# Altium PCB PCB.PcbDoc (part 1 of 2)
Units mm, origin at the board's own origin, x right, y up, seen from the top; angles counter-clockwise.
Board outline 148 x 108 mm, 2 copper layers (Top Layer, Bottom Layer); 136 components, 143 nets, 391 pads, 164 vias.
Unrouted connection lines stored in the file: 1.
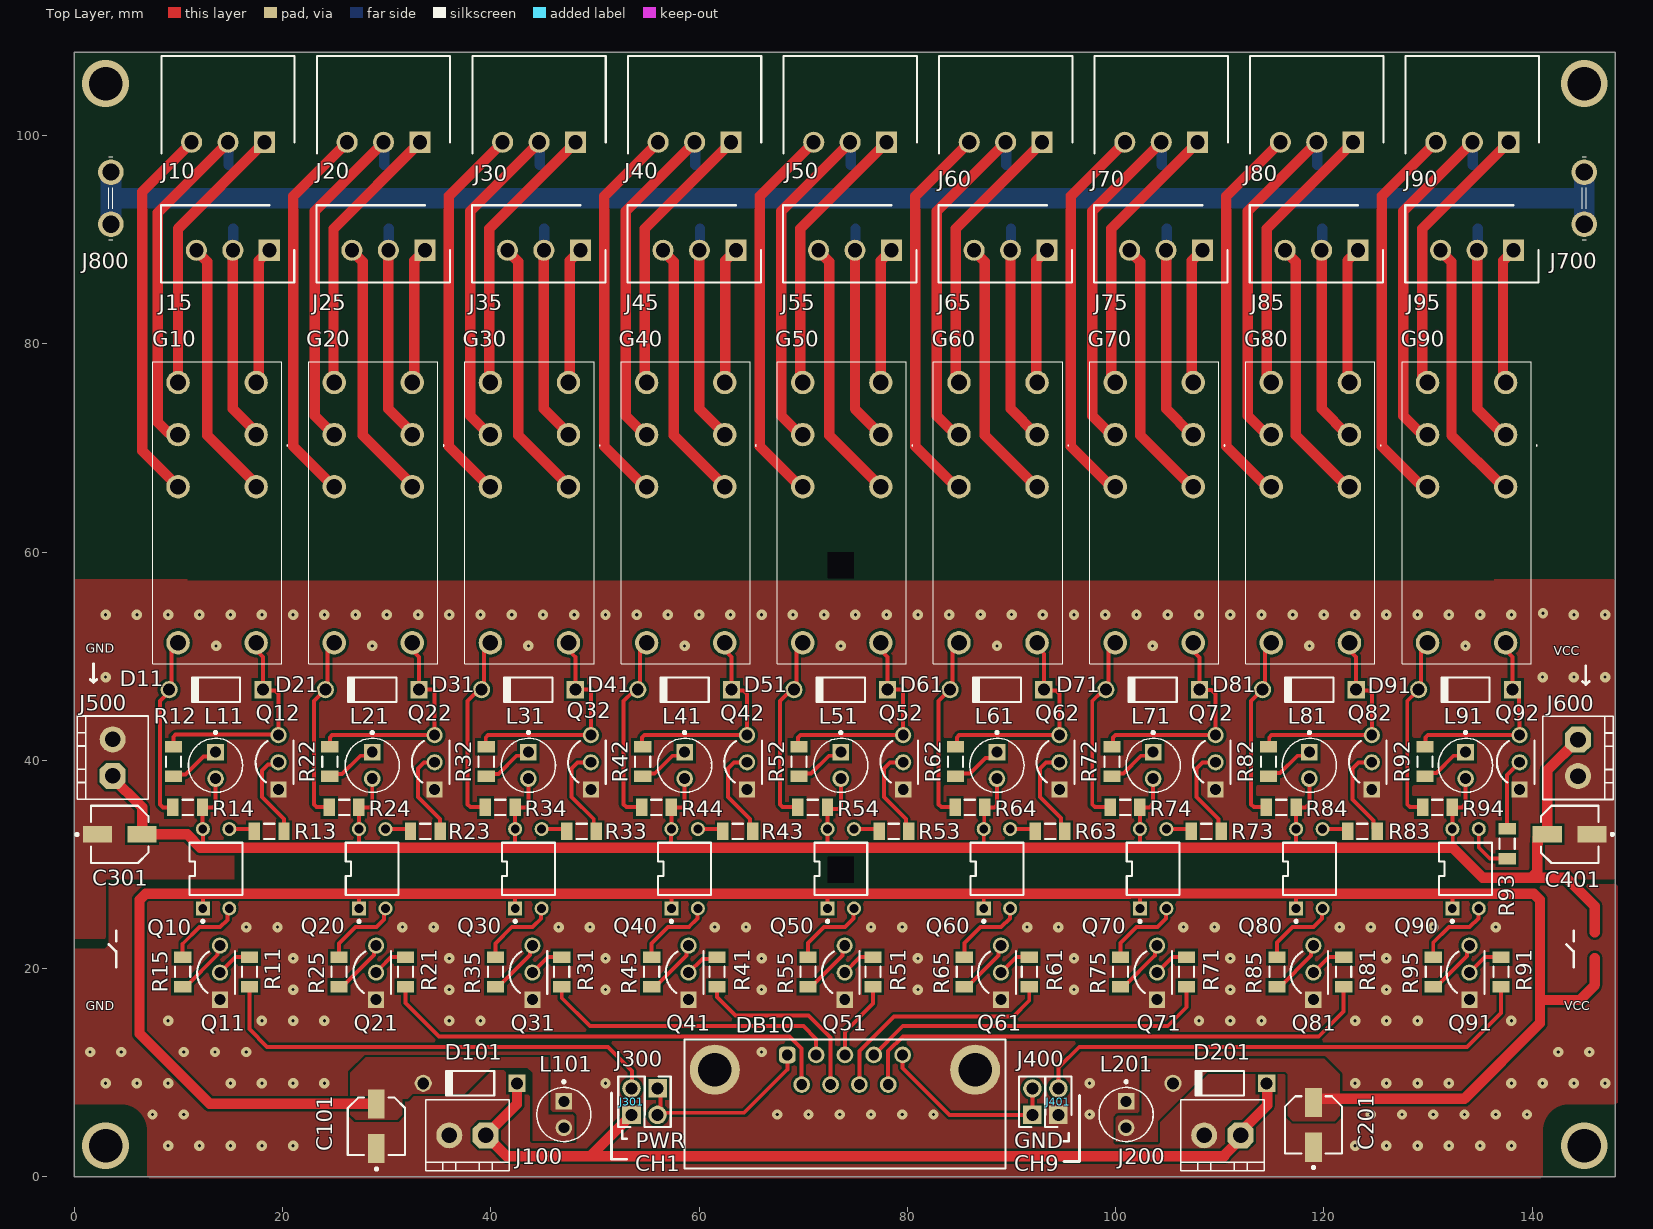
[diagram p0: Top Layer view]
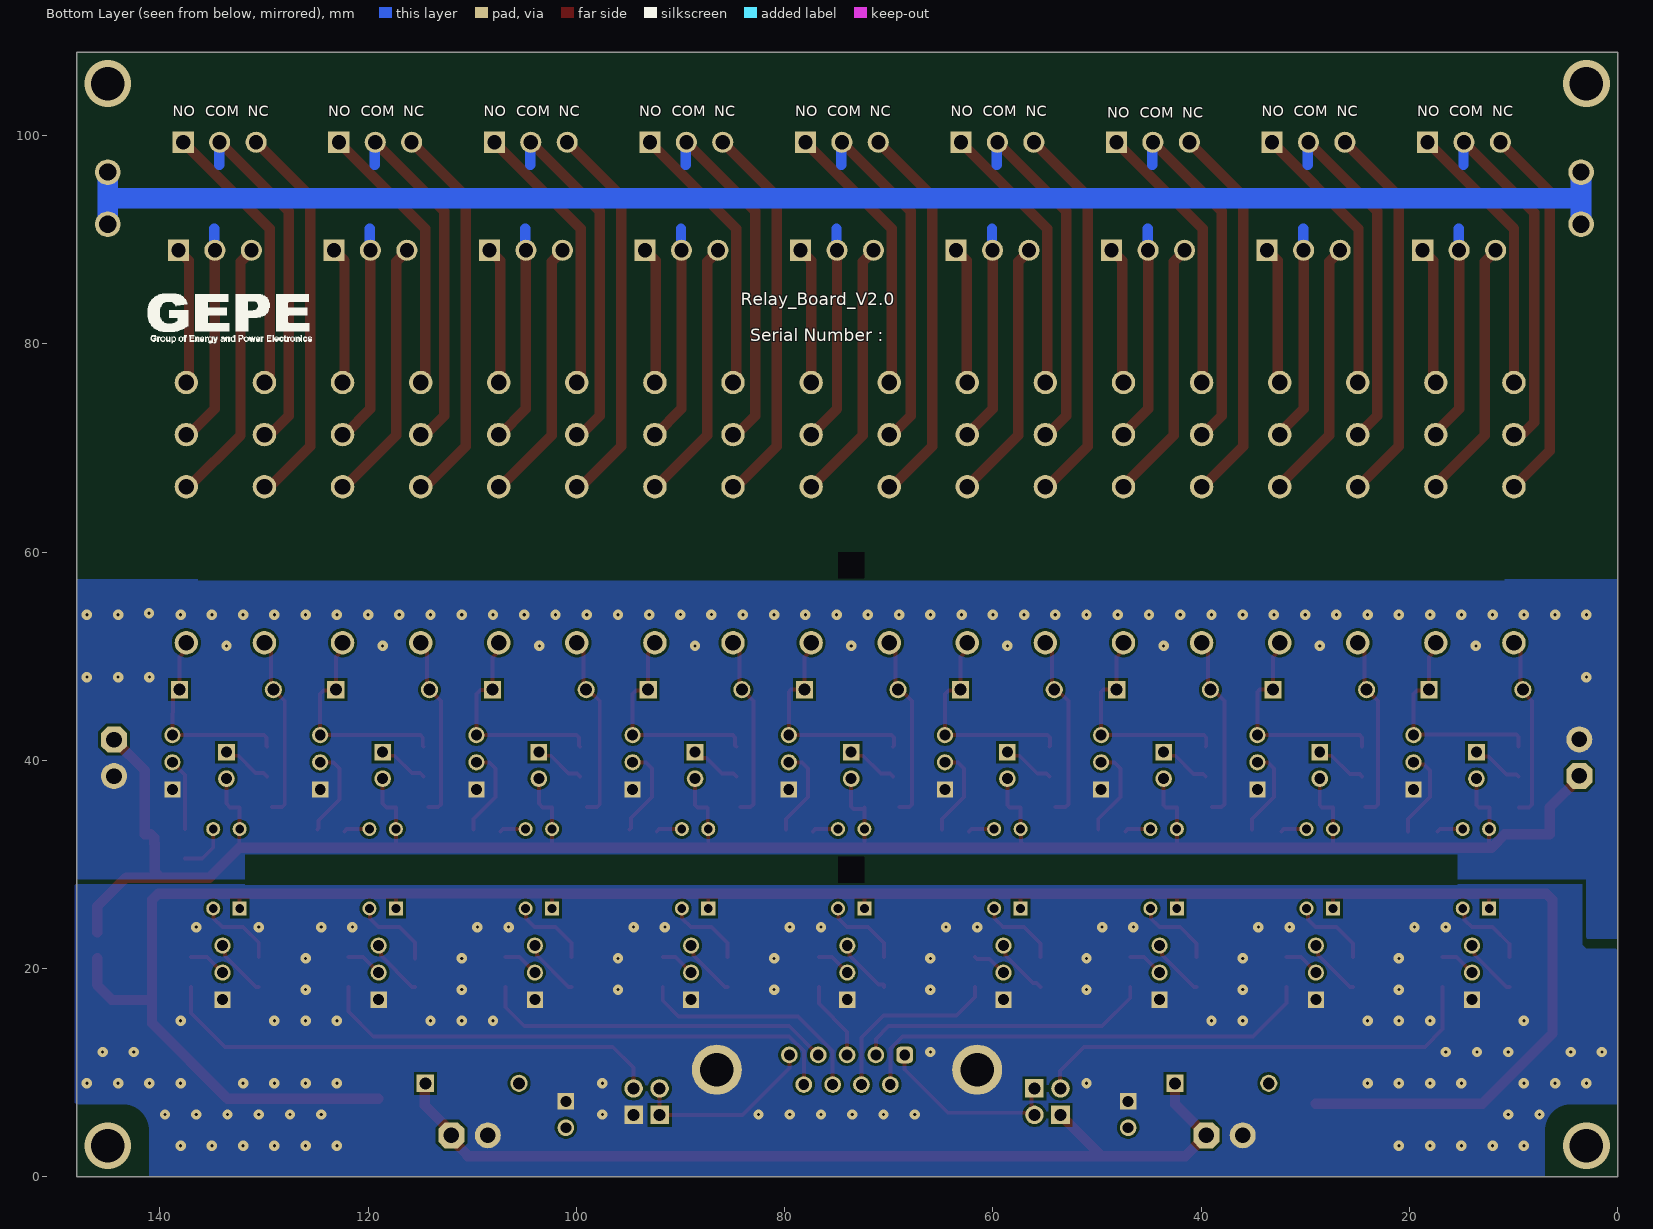
[diagram p1: Bottom Layer view, seen from below]

## Layer stack, top to bottom
Top Solder: solder mask 0.0102, Solder Resist, Dk 3.5
Top Layer: signal copper 0.0356
Dielectric 1: dielectric 0.32, FR-4, Dk 4.8
Bottom Layer: signal copper 0.0356
Bottom Solder: solder mask 0.0102, Solder Resist, Dk 3.5

## Board outline
0,0 0,108 148,108 148,0

## Design rules (kind name [scope] priority, off if disabled: settings)
Clearance Clearance_1 [OnMid vs OnMid] p1: gap=0.254 ignorepadtopadclearanceinfootprint=FALSE sourcerule=44 cellrowname=All cellrowtype=0 cellcolname=All cellcoltype=0 innerlayers=TRUE
Clearance Clearance_2 [(ExistsOnLayer('Top Layer') Or ExistsOnLayer('Bottom Layer')) vs (ExistsOnLayer('Top Layer') Or ExistsOnLayer('Bottom Layer'))] p2: gap=0.254 ignorepadtopadclearanceinfootprint=FALSE sourcerule=44 cellrowname=All cellrowtype=0 cellcolname=All cellcoltype=0 outerlayers=TRUE
Clearance [All] p3: gap=0.254 ignorepadtopadclearanceinfootprint=FALSE ismatrix=TRUE
PolygonConnect [All] p1: connectstyle=Direct reliefconductorwidth=0.254 reliefentries=4 polygonreliefangle="90 Angle" airgapwidth=0.254
RoutingVias [All] p1: holewidth=0.711 width=1.27 viastyle="Through Hole" minholewidth=0.711 minwidth=1.27 maxholewidth=0.711 maxwidth=1.27
SolderMaskExpansion [All] p1: expansion=0.102 istentingtop=FALSE
SupplyNets "Schematic Supply Nets_6" [InNet('GND')] p1: voltage=0.000
SupplyNets "Schematic Supply Nets_5" [InNet('3v3')] p2: voltage=0.000
SupplyNets "Schematic Supply Nets_4" [InNet('VCC')] p3: voltage=0.000
SupplyNets "Schematic Supply Nets_3" [InNet('GND1')] p4: voltage=0.000
SupplyNets "Schematic Supply Nets_2" [InNet('15v')] p5: voltage=0.000
SupplyNets "Schematic Supply Nets_1" [InNet('GND_MCU')] p6: voltage=0.000
SupplyNets "Schematic Supply Nets" [InNet('+15v')] p7: voltage=0.000
Width MaxMinWidth_1 [All] p1: maxlimit=2.5 minlimit=0.254 preferedwidth=0.3 minimp=50.000000 maximp=50.000000 favimp=50.000000
Width [All] p2: maxlimit=0.254 minlimit=0.254 preferedwidth=0.254
30 further rules are at their usual default settings.

## Classes and differential pairs
component class Sheet2: C301 C401 J10 J15 J20 J25 J30 J35 J40 J45 J50 J55 J60 J65 J70 J75 J80 J85 J90 J95 J500 J600 J700 J800
component class Sheet1: D11 D21 D31 D41 D51 D61 D71 D81 D91 G10 G20 G30 G40 G50 G60 G70 G80 G90 L11 L21 L31 L41 L51 L61 L71 L81 L91 Q12 Q22 Q32 Q42 Q52 Q62 Q72 Q82 Q92 R12 R13 R14 R22 R23 R24 R32 R33 R34 R42 R43 R44 R52 R53 R54 R62 R63 R64 R72 R73 R74 R82 R83 R84 R92 R93 R94

## Components (designator, comment, footprint, x,y, rotation, side; value= is the part's Value field where it differs from the comment)
C101 "EEE-FK1H100UR" FP-FKC-MFG 29,4.871 r90 top
C201 "EEE-FK1H100UR" FP-FKC-MFG 119,5 r90 top
C301 "EEE-FK1H100UR" FP-FKC-MFG 4.35,32.9 r0 top
C401 "EEE-FK1H100UR" FP-FKC-MFG 143.6,32.9 r180 top
D11 "1N4001-T" DIOD-DO-41-P-2_V 13.6,46.8 r180 top
D21 "1N4001-T" DIOD-DO-41-P-2_V 28.6,46.8 r180 top
D31 "1N4001-T" DIOD-DO-41-P-2_V 43.6,46.8 r180 top
D41 "1N4001-T" DIOD-DO-41-P-2_V 58.6,46.8 r180 top
D51 "1N4001-T" DIOD-DO-41-P-2_V 73.6,46.8 r180 top
D61 "1N4001-T" DIOD-DO-41-P-2_V 88.6,46.8 r180 top
D71 "1N4001-T" DIOD-DO-41-P-2_V 103.55,46.8 r180 top
D81 "1N4001-T" DIOD-DO-41-P-2_V 118.6,46.8 r180 top
D91 "1N4001-T" DIOD-DO-41-P-2_V 133.6,46.8 r180 top
D101 "1N4001-T" DIOD-DO-41-P-2_V 38,9 r180 top
D201 "1N4001-T" DIOD-DO-41-P-2_V 110,9 r180 top
DB10 "618009231221" 618009231221 74,7 r0 top
G10 "40.52.9.012.0000" 405290120000 17.45,71.3 r90 top
G20 "40.52.9.012.0000" 405290120000 32.45,71.3 r90 top
G30 "40.52.9.012.0000" 405290120000 47.45,71.3 r90 top
G40 "40.52.9.012.0000" 405290120000 62.45,71.3 r90 top
G50 "40.52.9.012.0000" 405290120000 77.45,71.3 r90 top
G60 "40.52.9.012.0000" 405290120000 92.45,71.3 r90 top
G70 "40.52.9.012.0000" 405290120000 107.45,71.3 r90 top
G80 "40.52.9.012.0000" 405290120000 122.45,71.3 r90 top
G90 "40.52.9.012.0000" 405290120000 137.45,71.3 r90 top
J10 "1546551-3" Terminal_3p_3.5mm_Horizontal 14.75,99.375 r0 top
J15 "1546551-3" Terminal_THT_3p_3.5mm_Vertical 18.713,89 r180 top
J20 "1546551-3" Terminal_3p_3.5mm_Horizontal 29.687,99.375 r0 top
J25 "1546551-3" Terminal_THT_3p_3.5mm_Vertical 33.65,89 r180 top
J30 "1546551-3" Terminal_3p_3.5mm_Horizontal 44.625,99.375 r0 top
J35 "1546551-3" Terminal_THT_3p_3.5mm_Vertical 48.587,89 r180 top
J40 "1546551-3" Terminal_3p_3.5mm_Horizontal 59.562,99.375 r0 top
J45 "1546551-3" Terminal_THT_3p_3.5mm_Vertical 63.525,89 r180 top
J50 "1546551-3" Terminal_3p_3.5mm_Horizontal 74.5,99.375 r0 top
J55 "1546551-3" Terminal_THT_3p_3.5mm_Vertical 78.462,89 r180 top
J60 "1546551-3" Terminal_3p_3.5mm_Horizontal 89.437,99.375 r0 top
J65 "1546551-3" Terminal_THT_3p_3.5mm_Vertical 93.4,89 r180 top
J70 "1546551-3" Terminal_3p_3.5mm_Horizontal 104.375,99.375 r0 top
J75 "1546551-3" Terminal_THT_3p_3.5mm_Vertical 108.337,89 r180 top
J80 "1546551-3" Terminal_3p_3.5mm_Horizontal 119.312,99.375 r0 top
J85 "1546551-3" Terminal_THT_3p_3.5mm_Vertical 123.275,89 r180 top
J90 "1546551-3" Terminal_3p_3.5mm_Horizontal 134.25,99.375 r0 top
J95 "1546551-3" Terminal_THT_3p_3.5mm_Vertical 138.212,89 r180 top
J100 "TB004-508-02BE" Terminal_TH_2P_3.50 41.75,0.6 r0 top
J200 "TB004-508-02BE" Terminal_TH_2P_3.50 114.25,0.6 r0 top
J300 "TB004-508-02BE" HEADER_MALE_TH_2P_2.54 56,8.5 r180 top
J301 "TB004-508-02BE" HEADER_MALE_TH_2P_2.54 53.5,5.96 r0 top
J400 "TB004-508-02BE" HEADER_MALE_TH_2P_2.54 92,5.96 r0 top
J401 "TB004-508-02BE" HEADER_MALE_TH_2P_2.54 94.5,5.96 r0 top
J500 "TB004-508-02BE" Terminal_TH_2P_3.50 0.275,36.275 r270 top
J600 "TB004-508-02BE" Terminal_TH_2P_3.50 147.8,44.25 r90 top
J700 "PCB_TAB" PCB_TAB_Vertical_6.35mm 145.127,91.5 r90 top
J800 "PCB_TAB" PCB_TAB_Vertical_6.35mm 3.373,96.5 r270 top
L11 "TLLG4400" FP-6_544-5255_01-4-MFG 13.55,39.53 r270 top
L21 "TLLG4400" FP-6_544-5255_01-4-MFG 28.6,39.53 r270 top
L31 "TLLG4400" FP-6_544-5255_01-4-MFG 43.6,39.53 r270 top
L41 "TLLG4400" FP-6_544-5255_01-4-MFG 58.6,39.53 r270 top
L51 "TLLG4400" FP-6_544-5255_01-4-MFG 73.6,39.53 r270 top
L61 "TLLG4400" FP-6_544-5255_01-4-MFG 88.6,39.53 r270 top
L71 "TLLG4400" FP-6_544-5255_01-4-MFG 103.6,39.53 r270 top
L81 "TLLG4400" FP-6_544-5255_01-4-MFG 118.6,39.53 r270 top
L91 "TLLG4400" FP-6_544-5255_01-4-MFG 133.6,39.53 r270 top
L101 "TLLG4400" FP-6_544-5255_01-4-MFG 47,6 r270 top
L201 "TLLG4400" FP-6_544-5255_01-4-MFG 101,6 r270 top
Q10 "PC817X1J000F" FP-PC817X1J000F-MFG 13.6,29.601 r90 top
Q11 "PN2222ATF" FAIR-TO-92-3 13.978,19.625 r90 top
Q12 "PN2222ATF" FAIR-TO-92-3 19.595,39.829 r90 top
Q20 "PC817X1J000F" FP-PC817X1J000F-MFG 28.6,29.601 r90 top
Q21 "PN2222ATF" FAIR-TO-92-3 28.978,19.625 r90 top
Q22 "PN2222ATF" FAIR-TO-92-3 34.595,39.829 r90 top
Q30 "PC817X1J000F" FP-PC817X1J000F-MFG 43.6,29.601 r90 top
Q31 "PN2222ATF" FAIR-TO-92-3 43.978,19.625 r90 top
Q32 "PN2222ATF" FAIR-TO-92-3 49.595,39.829 r90 top
Q40 "PC817X1J000F" FP-PC817X1J000F-MFG 58.6,29.601 r90 top
Q41 "PN2222ATF" FAIR-TO-92-3 58.978,19.625 r90 top
Q42 "PN2222ATF" FAIR-TO-92-3 64.595,39.829 r90 top
Q50 "PC817X1J000F" FP-PC817X1J000F-MFG 73.6,29.601 r90 top
Q51 "PN2222ATF" FAIR-TO-92-3 73.978,19.625 r90 top
Q52 "PN2222ATF" FAIR-TO-92-3 79.595,39.829 r90 top
Q60 "PC817X1J000F" FP-PC817X1J000F-MFG 88.6,29.601 r90 top
Q61 "PN2222ATF" FAIR-TO-92-3 88.978,19.625 r90 top
Q62 "PN2222ATF" FAIR-TO-92-3 94.595,39.829 r90 top
Q70 "PC817X1J000F" FP-PC817X1J000F-MFG 103.6,29.601 r90 top
Q71 "PN2222ATF" FAIR-TO-92-3 103.978,19.625 r90 top
Q72 "PN2222ATF" FAIR-TO-92-3 109.595,39.829 r90 top
Q80 "PC817X1J000F" FP-PC817X1J000F-MFG 118.6,29.601 r90 top
Q81 "PN2222ATF" FAIR-TO-92-3 118.978,19.625 r90 top
Q82 "PN2222ATF" FAIR-TO-92-3 124.595,39.829 r90 top
Q90 "PC817X1J000F" FP-PC817X1J000F-MFG 133.6,29.601 r90 top
Q91 "PN2222ATF" FAIR-TO-92-3 133.978,19.625 r90 top
Q92 "PN2222ATF" FAIR-TO-92-3 138.795,39.829 r90 top
R11 "1K" RESC3216X70X50NL05T20 16.8,19.689 r270 top
R12 "1K" RESC3216X70X50NL05T20 9.5,39.893 r270 top
R13 "1K" RESC3216X70X50NL05T20 18.7,33.2 r180 top
R14 "1K" RESC3216X70X50NL05T20 10.875,35.5 r180 top
R15 "1K" RESC3216X70X50NL05T20 10.4,19.689 r270 top
R21 "1K" RESC3216X70X50NL05T20 31.8,19.689 r270 top
R22 "1K" RESC3216X70X50NL05T20 24.525,39.893 r270 top
R23 "1K" RESC3216X70X50NL05T20 33.7,33.2 r180 top
R24 "1K" RESC3216X70X50NL05T20 25.9,35.5 r180 top
R25 "1K" RESC3216X70X50NL05T20 25.413,19.689 r270 top
R31 "1K" RESC3216X70X50NL05T20 46.8,19.689 r270 top
R32 "1K" RESC3216X70X50NL05T20 39.55,39.893 r270 top
R33 "1K" RESC3216X70X50NL05T20 48.7,33.2 r180 top
R34 "1K" RESC3216X70X50NL05T20 40.9,35.5 r180 top
R35 "1K" RESC3216X70X50NL05T20 40.425,19.689 r270 top
R41 "1K" RESC3216X70X50NL05T20 61.7,19.689 r270 top
R42 "1K" RESC3216X70X50NL05T20 54.575,39.893 r270 top
R43 "1K" RESC3216X70X50NL05T20 63.7,33.2 r180 top
R44 "1K" RESC3216X70X50NL05T20 55.9,35.5 r180 top
R45 "1K" RESC3216X70X50NL05T20 55.438,19.689 r270 top
R51 "1K" RESC3216X70X50NL05T20 76.7,19.689 r270 top
R52 "1K" RESC3216X70X50NL05T20 69.6,39.893 r270 top
R53 "1K" RESC3216X70X50NL05T20 78.7,33.2 r180 top
R54 "1K" RESC3216X70X50NL05T20 70.9,35.5 r180 top
R55 "1K" RESC3216X70X50NL05T20 70.45,19.689 r270 top
R61 "1K" RESC3216X70X50NL05T20 91.7,19.689 r270 top
R62 "1K" RESC3216X70X50NL05T20 84.625,39.893 r270 top
R63 "1K" RESC3216X70X50NL05T20 93.7,33.2 r180 top
R64 "1K" RESC3216X70X50NL05T20 86,35.5 r180 top
R65 "1K" RESC3216X70X50NL05T20 85.463,19.689 r270 top
R71 "1K" RESC3216X70X50NL05T20 106.8,19.689 r270 top
R72 "1K" RESC3216X70X50NL05T20 99.65,39.893 r270 top
R73 "1K" RESC3216X70X50NL05T20 108.7,33.2 r180 top
R74 "1K" RESC3216X70X50NL05T20 100.9,35.5 r180 top
R75 "1K" RESC3216X70X50NL05T20 100.475,19.689 r270 top
R81 "1K" RESC3216X70X50NL05T20 121.9,19.689 r270 top
R82 "1K" RESC3216X70X50NL05T20 114.675,39.893 r270 top
R83 "1K" RESC3216X70X50NL05T20 123.7,33.2 r180 top
R84 "1K" RESC3216X70X50NL05T20 115.9,35.5 r180 top
R85 "1K" RESC3216X70X50NL05T20 115.488,19.689 r270 top
R91 "1K" RESC3216X70X50NL05T20 137,19.689 r270 top
R92 "1K" RESC3216X70X50NL05T20 129.7,39.893 r270 top
R93 "1K" RESC3216X70X50NL05T20 137.6,32 r270 top
R94 "1K" RESC3216X70X50NL05T20 130.9,35.5 r180 top
R95 "1K" RESC3216X70X50NL05T20 130.5,19.689 r270 top

## Footprints (in the part's own frame and the unit in brackets; to place one, negate y for a bottom-side part, rotate by r counter-clockwise, add the part's x,y. Pads: shape width x height; smd on the part's side, far side on the other; paste and mask are expansions set on the pad)
405290120000 [mm]
  round 2.25 hole 1.5: 11(0,0) 12(-5,0) 14(5,0) 21(0,7.5) 22(-5,7.5) 24(5,7.5) A1(-20,0) A2(-20,7.5)
  silkscreen extent -22,-3.05 7,9.95, body extent -22,-2.45 7,9.95, height 25.1
618009231221 [mm] "9 pins, right angled, 8.08mm, with hex screw"
  rrect50% 1.6x1.6 hole 1.04: 1(-5.54,4.72)
  round 1.6 hole 1.04: 2(-2.77,4.72) 3(0,4.72) 4(2.77,4.72) 5(5.54,4.72) 6(-4.155,1.88) 7(-1.385,1.88) 8(1.385,1.88) 9(4.155,1.88)
  round 4.8 hole 3.2: M1(-12.5,3.3) M2(12.5,3.3)
  silkscreen extent -15.4,-6.2 15.4,6.2, body extent -15.4,-12.2 15.4,6.2, height 12.57
DIOD-DO-41-P-2_V [mm] "2-Leads, Axial Lead, Body 4.635x2.36mm, Pin Spacing 9mm"
  rect 1.65x1.65 hole 1.15: 1(-4.5,0)
  round 1.65 hole 1.15: 2(4.5,0)
  silkscreen extent -2.32,-1.18 2.32,1.18, body extent -4.93,-1.18 4.93,1.18, height 2.35
FAIR-TO-92-3 [mm] "TO, 3-Leads, Body Dia 4.79mm, Pitch 2.6mm"
  rect 1.55x1.55 hole 1.05: 1(-2.6,0)
  round 1.55 hole 1.05: 2(0,0) 3(2.6,0)
  silkscreen extent -2.07,-1.43 2.07,2.19, body extent -2.4,-1.47 2.4,2.2, height 8.49
FP-6_544-5255_01-4-MFG [mm]
  rect 1.6x1.6 hole 1.05 paste-2539.97 mask+0: 1(-1.27,0)
  round 1.6 hole 1.05 paste-2539.97 mask+0: 2(1.27,0)
  silkscreen extent -3.27,-2.6 2.6,2.6, body extent -2.32,-2.32 2.32,2.32, height 0.25
FP-FKC-MFG [mm]
  rect 2.8x1.6 smd paste+0 mask+0: 1(-2.15,0) 2(2.15,0)
  silkscreen extent -4.22,-2.75 2.75,2.75, body extent -3.8,-3 3.8,3, height 0.25
FP-PC817X1J000F-MFG [mm]
  rect 1.35x1.35 hole 0.85 paste-2539.97 mask+0: 1(-3.81,1.27)
  round 1.35 hole 0.85 paste-2539.97 mask+0: 2(-3.81,-1.27) 3(3.81,-1.27) 4(3.81,1.27)
  silkscreen extent -5.17,-2.54 2.5,2.54, body extent -4.58,-2.64 4.58,2.64, height 0.25
HEADER_MALE_TH_2P_2.54 [mil]
  rect 70x70 hole 45: 1(0,0)
  round 70 hole 45: 2(0,100)
  silkscreen extent -50,-45 50,145, body extent -50,-45 50,145, height 338
PCB_TAB_Vertical_6.35mm [mm]
  round 2.46 hole 1.64: 1(0,0.127) 2(5,0.127)
  silkscreen extent -1.5,-0.07 6.5,0.33, body extent -1.5,-0.27 6.5,0.53, height 12.71
RESC3216X70X50NL05T20 [mm] "Chip Resistor, 2-Leads, Body 3.20x1.60mm, IPC Medium Density"
  rect 1.1x1.65 smd: 1(-1.425,0) 2(1.425,0)
  silkscreen extent -0.5,-0.72 0.5,0.72, body extent -1.63,-0.82 1.62,0.82, height 0.7
Terminal_3p_3.5mm_Horizontal [mm]
  rect 2.025x2.025 hole 1.35: 1(3.5,0)
  round 2.025 hole 1.35: 2(0,0) 3(-3.5,0)
  silkscreen extent -6.4,-1.1 6.4,8.3, body extent -6.25,-1 6.25,8.2, height 7.25
Terminal_TH_2P_3.50 [mm]
  oct 2.5x2.5 hole 1.5: 1(-2.25,3.4)
  round 2.5 hole 1.5: 2(-5.75,3.4)
  silkscreen extent -8,0 0,6.8, body extent -8,0 0,6.8, height 8.4
Terminal_THT_3p_3.5mm_Vertical [mm]
  rect 2.025x2.025 hole 1.35: 1(0,0)
  round 2.025 hole 1.35: 2(3.5,0) 3(7,0)
  silkscreen extent -2.4,-4.33 10.4,3.08, body extent -2.75,-3.62 9.75,3.62, height 9.4

## Part data
C101 C201 C301 C401: library part CMP-05427-000030-1, "CAP ALUM 10UF 20% 50V SMD", Capacitance=10uF, Case/Package=Radial, Dielectric Material=Aluminium, ESR (Equivalent Series Resistance)=1.52R, Leakage Current=3uA, Max Operating Temperature=105°C, Min Operating Temperature=-55°C, Package Quantity=1000, Ripple Current=85mA, Tolerance=20%, Voltage=50V, Construction=Cylindrical, Contact Plating=Tin, Diameter=5mm, Height=5.8mm, Height - Seated (Max)=0.228inch, Impedance=1.52R, Lead Free="Lead Free", Length=5.8mm, Life (Hours)=2000Hour, Material=Aluminium, Mount="Surface Mount", Number of Pins=2, Packaging="Tape and Reel", Radiation Hardening=No, REACH SVHC="No SVHC", Ripple Current (AC)=85mA, RoHS Compliant=Yes, Series=FK, Termination=SMD/SMT, Voltage Rating=50V, Voltage Rating (DC)=50V, Width=6.5mm
D11 D21 D31 D41 D51 D61 D71 D81 D91 D101 D201: library part CMP-0639-00006-2, "1.0 A Rectifier, 15 pF, 50 V, -65 to 150 degC, 2-Pin DO-41 Plastic, RoHS, Tape and Reel", Manufacturer="Diodes Inc", Max. Average Rectified Current IO (A)=1, Operating Temperature Range (degC)="-65 to 150", ComponentLink1Description="Manufacturer URL", ComponentLink1URL=http://diodes.com/, ComponentLink2Description=Datasheet, ComponentLink2URL=http://diodes.com/datasheets/ds28002.pdf, CT (pF)=15, DatasheetVersion="Rev. 8-2", Max. IFSM (A)=30, Max. IR (uA)=5, Mounting Technology="Through Hole", PackageDescription="2-Pin Axial Lead, Body 4.635 x 2.36 mm, Lead Spread 25.4 mm", PackageReference=DO-41-P-2, Packing="Tape and Reel", PartNumber=1N4001-T, RoHS=TRUE, VF (V)=1, VRRM (V)=50
DB10: library part CMP-1502-00284-2, Contact Resistance=30mΩ, Current Rating=3A, Insulation Resistance=5GΩ, Max Operating Temperature=105°C, Min Operating Temperature=-55°C, Operating Supply Voltage=125V, Contact Material=Gold, Contact Plating=Gold, Depth=18.5mm, Gender=Male, Height=12.7mm, Housing Material=Steel, Insulation Material=PBT, Length=30.8mm, Mount="Through Hole", NexarPartId=22865742, Number of Contacts=9, Number of Pins=9, Number Of Rows=2, Orientation="Right Angle", Pitch=2.77mm, REACH SVHC=Unknown, RoHS=Compliant, Termination=SMD/SMT, Voltage Rating=125V, Width=12.5mm
G10 G20 G30 G40 G50 G60 G70 G80 G90: library part "Relay 40.52.9.012.0000", "Relay or Contactor", Manufacturer_Name=FINDER, Datasheet Link=http://uk.rs-online.com/web/p/products/1829776, Height=25mm, Manufacturer_Part_Number=40.52.9.012.0000
J10 J15 J20 J25 J30 J35 J40 J45 J50 J55 J60 J65 J70 J75 J80 J85 J90 J95: library part Con_Terminal_3P, "Terminal", Manufacturer_Name="TE Connectivity", Mouser Part Number=571-1546551-3, Arrow Part Number=1546551-3, Arrow Price/Stock=https://www.arrow.com/en/products/1546551-3/te-connectivity, Datasheet Link=https://www.te.com/commerce/DocumentDelivery/DDEController?Action=srchrtrv&DocNm=1546551&DocType=Customer+Drawing&DocLang=English&DocFormat=pdf&PartCntxt=1546551-3, Height=8.5mm, Manufacturer_Part_Number=1546551-3, Mouser Price/Stock=https://www.mouser.co.uk/ProductDetail/TE-Connectivity/1546551-3?qs=m%2FhmcwQ75LlRawcWGeRFDA%3D%3D
J100 J200 J500 J600: library part Con_Terminal_2P, "Connector", Manufacturer_Name="CUI Devices", Mouser Part Number=490-TB004-508-02BE, Arrow Part Number=TB004-508-02BE, Arrow Price/Stock=https://www.arrow.com/en/products/tb004-508-02be/cui-inc, Datasheet Link=https://componentsearchengine.com/Datasheets/1/TB004-508-02BE.pdf, Height=14.1mm, Manufacturer_Part_Number=TB004-508-02BE, Mouser Price/Stock=https://www.mouser.co.uk/ProductDetail/CUI-Devices/TB004-508-02BE?qs=vLWxofP3U2zLwdGzG2tSkA%3D%3D
J300 J301 J400 J401: library part Con_Header_2P, "Connector", Manufacturer_Name="CUI Devices", Mouser Part Number=490-TB004-508-02BE, Arrow Part Number=TB004-508-02BE, Arrow Price/Stock=https://www.arrow.com/en/products/tb004-508-02be/cui-inc, Datasheet Link=https://componentsearchengine.com/Datasheets/1/TB004-508-02BE.pdf, Height=14.1mm, Manufacturer_Part_Number=TB004-508-02BE, Mouser Price/Stock=https://www.mouser.co.uk/ProductDetail/CUI-Devices/TB004-508-02BE?qs=vLWxofP3U2zLwdGzG2tSkA%3D%3D
L11 L21 L31 L41 L51 L61 L71 L81 L91 L101 L201: library part CMP-00030-55433990-1, "TLLG4400 Led, Pcb, Green, 0.63MCD, 3MM, T-1, 7MA, 1.9V, 565NM, 25DEG, 20V, 20MW, -40", Case/Package=T, Color=Green, Forward Current=2mA, Forward Voltage=1.9V, Max Operating Temperature=100°C, Max Power Dissipation=20mW, Min Operating Temperature=-40°C, Reverse Voltage=20V, Voltage Rating (DC)=2.4V, Depth=3.2mm, Dominant Wavelength=575nm, Height=4.5mm, Illumination Color=Green, Length=3.2mm, Lens Color=Green, Lens Size=3mm, Lens Style="Circular, Colored, Diffused, Dome, Round", Lens Transparency=Diffused, Luminous Intensity=1.2mcd, Mount="Through Hole", NexarPartId=55433990, Number of Elements=1, Number of LEDs=1, Number of Pins=2, Power Dissipation=20mW, Radiation Hardening=No, REACH SVHC=Unknown, RoHS=Compliant, Schedule B="8541402000, 8541402000", Test Current=2mA, Viewing Angle=50°, Wavelength=575nm
Q10 Q20 Q30 Q40 Q50 Q60 Q70 Q80 Q90: library part CMP-65434-000003-1, "OPTOISOLATOR 5KV TRANS 4DIP", Case/Package=DIP, Collector Emitter Breakdown Voltage=80V, Collector Emitter Saturation Voltage=200mV, Current Transfer Ratio=600%, Forward Current=50mA, Forward Voltage=1.4V, Input Current=20mA, Isolation Voltage=5kV, Max Operating Temperature=100°C, Max Power Dissipation=200mW, Min Operating Temperature=-30°C, Package Quantity=2000, Reverse Breakdown Voltage=6V, Collector Emitter Voltage (VCEO)=80V, Fall Time=18000ns, Max Collector Current=50mA, Max Input Current=50mA, Mount="Through Hole", Number of Channels=1, Number of Elements=1, Number of Pins=4, Output Current per Channel=50mA, Output Voltage=80V, Packaging=Sleeve, Power Dissipation=200mW, Radiation Hardening=No, Rise Time=18000ns
Q11 Q12 Q21 Q22 Q31 Q32 Q41 Q42 Q51 Q52 Q61 Q62 Q71 Q72 Q81 Q82 Q91 Q92: library part CMP-2000-06911-1, "NPN General-Purpose Amplifier, 40 V, -55 to 150 degC, 3-Pin TO-92, RoHS, Tape and Reel", Collector- Base Voltage VCBO=75V, Collector- Emitter Voltage VCEO Max=40V, Collector-Emitter Saturation Voltage=1V, DC Current Gain hFE Max=300, Emitter- Base Voltage VEBO=6V, Manufacturer=FairchildSemiconductor, Maximum DC Collector Current=1A, Maximum Operating Temperature=+150C, Maximum Power Dissipation=625mW, Minimum Operating Temperature=-55C, Package / Case=TO-92-3KinkedLead, Package Description="3-Pin Transistor Outline Package, Body Dia 4.79 mm, Pitch 2.6 mm", Package Reference=TO-92, <PCN>=http://www.mouser.com/PCN/3.26.10LTBDFairchild.pdf, Brand=FairchildSemiconductor, Configuration=Single, Datasheet URL=https://www.fairchildsemi.com/datasheets/PN/PN2222A.pdf, Datasheet Version="Rev. 1.1.0, 07/2014", DC Collector/Base Gain hfe Min=100, Factory Pack Quantity=2000, Gain Bandwidth Product fT=300MHz, Manufacturer URL=https://www.fairchildsemi.com/, Mounting Style=ThroughHole, Mounting Technology=ThroughHole, Packaging=Reel, Product Category=BipolarTransistors-BJT, RoHS=Details, Series=PN2222, Transistor Polarity=NPN, Unit Weight=0.008466oz
R11 R12 R13 R14 R15 R21 R22 R23 R24 R25 R31 R32 R33 R34 R35 R41 R42 R43 R44 R45 R51 R52 R53 R54 R55 R61 R62 R63 R64 R65 R71 R72 R73 R74 R75 R81 R82 R83 R84 R85 R91 R92 R93 R94 R95: library part CMP-2003-00541-1, Manufacturer=Panasonic, Part Number=ERJ-8GEY0R00V

## Free pads (board coordinates)
  rrect50% 0x0 hole 2.5 square: 2(73.6,29.5) 2(73.6,58.75)

## Via types
v1: diameter 1, hole 0.3, Top Layer to Bottom Layer, 160 vias
v2: diameter 4.5, hole 3.2, Top Layer to Bottom Layer, 4 vias

## Nets (pads, with @x,y where several pads share a name; then routed paths per layer and width w, separated by ;. In a path a pad name is that pad's centre, name@x,y a point inside that pad or via, vN(x,y) a via of type N, cw(c..) or ccw(c..) an arc to the next point about the centre after c; other vN are vias at no path point)
3v3: DB10.1 J300.1 J300.2 | length 18.1
  Top Layer w0.381: J300.2 56.265,6.225 56.265,8.235 J300.1 ; J300.2@56.235,6.17 64.32,6.17 68.46,10.31 DB10.1
15v: D101.1 D201.1 J100.1 J200.1 J301.1 | length 92.7
  Top Layer w1: D101.1 42.5,7 J100.1 41.5,2 49.525,2 ; J301.1@53.7,6.175 49.525,2 ; D201.1@114.55,9.076 114.55,6.882 112,4.332 J200.1 112,3.668 110.41,2.078 110.41,1.996 107.67,1.996 107.666,2 49.525,2
+15v: C101.2 C201.2 D101.2 D201.2 L101.2 L201.2 Q10.1 Q20.1 Q30.1 Q40.1 Q50.1 Q60.1 Q70.1 Q80.1 Q90.1 | length 234.5
  Top Layer w0.38: 12,27.5 12.28,27.22 12.33,27.17 Q10.1 ; Q20.1 27.33,27.22 27.33,27.33 ; Q30.1 42.33,27.22 42.33,27.33 42.5,27.5 ; 57,27.5 57.28,27.22 57.33,27.17 Q40.1 ; 72,27.5 72.28,27.22 72.33,27.17 Q50.1 ; 87,27.5 87.28,27.22 87.33,27.17 Q60.1 ; 100.995,27.506 101.275,27.226 101.281,27.22 101.325,27.176 ; Q70.1 102.33,27.226 ; Q80.1 117.33,27.22 117.33,27.226 117.33,27.33 117.5,27.5 ; Q90.1 132.33,27.22 132.33,27.33 132.5,27.5
  Top Layer w1: C101.2 12.979,7.021 6.25,13.75 6.25,26.634 6.836,27.22 12.28,27.22 27.33,27.22 42.33,27.22 57.28,27.22 72.28,27.22 87.28,27.22 101.281,27.22 101.325,27.22 ; 101.275,27.226 102.33,27.226 117.33,27.226 ; 117.33,27.22 132.33,27.22 140.164,27.22 140.75,26.634 140.75,17 ; C201.2@119,7.5 133.5,7.5 140.75,14.75 140.75,17 ; 145.951,18.351 144.6,17 140.75,17 ; 146,18.487 146,21
Base1: J301.2 R11.2 | length 44
  Top Layer w0.381: R11.2 16.8,14.2 18.5,12.5 51.235,12.5 53.559,10.175 53.559,8.856 J301.2@53.7,8.715
Base2: DB10.6 R21.2 | length 44.9
  Top Layer w0.381: R21.2 31.8,16.7 35,13.5 68.674,13.5 69.845,12.329 DB10.6
Base3: DB10.2 R31.2 | length 28.7
  Top Layer w0.381: R31.2 46.8,17.2 49.5,14.5 70,14.5 71.23,13.27 DB10.2
Base4: DB10.7 R41.2 | length 18
  Top Layer w0.381: R41.2 61.7,17.3 63.5,15.5 70.5,15.5 72.615,13.385 DB10.7
Base5: DB10.3 R51.2 | length 7.7
  Top Layer w0.381: DB10.3 74,13.944 76.7,16.644 R51.2
Base6: DB10.8 R61.2 | length 22.9
  Top Layer w0.381: DB10.8 75.385,12.095 78.711,15.421 90.171,15.421 91.7,16.95 R61.2
Base7: DB10.4 R71.2 | length 33.9
  Top Layer w0.381: DB10.4 79.55,14.5 105,14.5 106.8,16.3 R71.2
Base8: DB10.9 R81.2 | length 50.9
  Top Layer w0.381: DB10.9 78.155,12.095 79.56,13.5 119.5,13.5 121.9,15.9 R81.2
Base9: J401.2 R91.2 | length 49.2
  Top Layer w0.381: J401.2 94.5,10.5 96.5,12.5 133.75,12.5 137,15.75 R91.2
GND: C301.1 C401.1 J500.2 J600.2 Q12.1 Q22.1 Q32.1 Q42.1 Q52.1 Q62.1 Q72.1 Q82.1 Q92.1
  other v1: 3,48 141,48 144,48 147,48 13.6,51 28.6,51 43.6,51 58.6,51 73.6,51 88.6,51 103.55,51 118.6,51 133.6,51 3,54 6,54 9,54 12,54 15,54 18,54 21,54 24,54 27,54 30,54 33,54 36,54 39,54 42,54 45,54 48,54 51,54 54,54 57,54 60,54 63,54 66,54 69,54 72,54 75,54 78,54 81,54 84,54 87.032,54.006 90,54.006 93,54 96,54 99,54 102,54 105,54 108,54 111,54 114,54 117,54 120,54 123,54 126,54 129,54 132,54 135,54 138,54 144,54 147,54 141.043,54.134
GND1: DB10.5 J400.1 J400.2 | length 17.7
  Top Layer w0.381: DB10.5 79.54,10.46 84.04,5.96 J400.1 J400.2@92,8.12
GND_MCU: C101.1 C201.1 DB10.M1 DB10.M2 J100.2 J200.2 J401.1 L101.1 L201.1 Q11.1 Q21.1 Q31.1 Q41.1 Q51.1 Q61.1 Q71.1 Q81.1 Q91.1
  other v1: 9,3 12,3 15,3 18,3 21,3 123,3 126,3 129,3 132,3 135,3 138,3 7.5,6 10.5,6 67.5,6 70.5,6 73.5,6 76.5,6 79.5,6 82.5,6 97.5,6 124.5,6 127.5,6 130.5,6 133.5,6 136.5,6 139.5,6 3,9 6,9 9,9 15,9 18,9 21,9 24,9 51,9 97.5,9 123,9 126,9 129,9 132,9 138,9 141,9 144,9 147,9 1.5,12 4.5,12 10.5,12 13.5,12 16.5,12 66,12 142.5,12 145.5,12 9,15 18,15 21,15 24,15 36,15 39,15 108,15 111,15 114,15 123,15 126,15 129,15 138,15 21,18 36,18 51,18 66,18 81,18 96,18 111,18 126,18 21,21 36,21 51,21 66,21 81,21 96,21 111,21 126,21 16.5,24 19.5,24 31.5,24 34.5,24 46.5,24 49.5,24 61.5,24 64.5,24 76.5,24 79.5,24 91.5,24 94.5,24 106.5,24 109.5,24 121.5,24 124.5,24 130.5,24 136.5,24
NetC301_2: C301.2 C401.2 J500.1 J600.1 L11.2 L21.2 L31.2 L41.2 L51.2 L61.2 L71.2 L81.2 L91.2 Q10.4 Q20.4 Q30.4 Q40.4 Q50.4 Q60.4 Q70.4 Q80.4 Q90.4 R14.1 R24.1 R34.1 R44.1 R54.1 R64.1 R74.1 R84.1 R94.1 | length 237.8
  Top Layer w0.3: Q90.4 132.371,33.37 132.371,31.621
  Top Layer w0.38: 12.099,31.621 12.33,31.852 Q10.4 12.315,33.426 12.315,35.485 R14.1 13.327,35.5 13.55,35.723 L11.2 ; 27.05,31.621 27.33,31.901 Q20.4 27.328,33.414 27.328,35.498 R24.1 28.377,35.5 28.6,35.723 L21.2 ; 42,31.621 42.33,31.951 Q30.4 42.328,33.414 42.328,35.497 R34.1 43.377,35.5 43.6,35.723 L31.2 ; 56.75,31.621 57.295,32.166 57.295,33.376 Q40.4 57.328,33.414 57.328,35.498 R44.1 58.377,35.5 58.6,35.723 L41.2 ; 72,31.621 72.33,31.951 Q50.4 72.328,33.414 72.328,35.35 72.328,35.498 R54.1 ; R54.1@72.475,35.35 73.377,35.35 73.6,35.573 L51.2 ; 87,31.621 87.33,31.951 Q60.4 87.378,33.459 87.378,35.452 R64.1 88.377,35.5 88.6,35.723 L61.2 ; 102.25,31.621 102.33,31.701 Q70.4 102.328,33.414 102.328,35.498 R74.1 103.25,35.5 103.6,35.85 L71.2 ; 117.25,31.621 117.33,31.701 Q80.4 117.327,33.414 117.327,35.498 R84.1 118.25,35.5 118.6,35.85 L81.2 ; Q90.4 132.328,33.414 132.328,35.498 R94.1 133.25,35.5 133.6,35.85 L91.2
  Top Layer w1: J500.1@3.5,38.5 6.5,35.5 C301.2 10.82,32.9 12.099,31.621 27.05,31.621 42,31.621 56.75,31.621 72,31.621 87,31.621 102.25,31.621 117.25,31.621 132.371,31.621 135.242,28.75 139.914,28.75 ; J600.1 141.45,39.05 C401.2 140.85,32.9 140.55,32.6 140.55,32.064 140.5,32.014 140.5,29.336 139.914,28.75 ; 145.956,26.044 143.25,28.75 139.914,28.75 ; 146,23.5 146,26.013
NetD11_1: D11.1 G10.A1 Q12.3 R12.1 | length 21.7
  Top Layer w0.38: R12.1 9.5,42.277 9.723,42.5 19.524,42.5 Q12.3 19.595,46.405 19.272,46.728 18.172,46.728 D11.1 18.1,49.953 17.05,51.003 G10.A1@17.05,51.3
NetD11_2: D11.2 G10.A2 R14.2 | length 17.4
  Top Layer w0.38: R14.2 8.5,35.5 8.231,35.769 8.231,45.696 9.1,46.565 D11.2 9.325,47.025 9.325,51.075 G10.A2@9.55,51.3
NetD21_1: D21.1 G20.A1 Q22.3 R22.1 | length 21.7
  Top Layer w0.38: R22.1 24.525,42.206 24.748,42.429 Q22.3 34.595,46.577 34.373,46.8 D21.1 33.1,49.953 32.05,51.003 G20.A1@32.05,51.3
NetD21_2: D21.2 G20.A2 R24.2 | length 17.7
  Top Layer w0.38: D21.2@24.094,47.042 23.869,46.817 23.869,46.583 23,45.714 23,35.786 23.269,35.517 R24.2@24.219,35.517 ; D21.2 24.325,47.025 24.325,51.075 G20.A2@24.55,51.3
NetD31_1: D31.1 G30.A1 Q32.3 R32.1 | length 21.8
  Top Layer w0.38: R32.1 39.5,41.367 39.5,42.206 39.723,42.429 Q32.3 49.595,46.577 49.373,46.8 D31.1 48.1,49.953 47.05,51.003 G30.A1@47.05,51.3
NetD31_2: D31.2 G30.A2 R34.2 | length 17.7
  Top Layer w0.38: D31.2@38.844,47.042 38.619,46.817 38.619,46.583 37.75,45.714 37.75,35.786 38.019,35.517 R34.2@38.969,35.517 ; D31.2 39.325,47.025 39.325,51.075 G30.A2@39.55,51.3
NetD41_1: D41.1 G40.A1 Q42.3 R42.1 | length 21.7
  Top Layer w0.38: R42.1 54.5,41.392 54.5,42.206 54.723,42.429 Q42.3 64.595,46.405 64.272,46.728 63.172,46.728 D41.1 63.1,49.953 62.05,51.003 G40.A1@62.05,51.3
NetD41_2: D41.2 G40.A2 R44.2 | length 17.7
  Top Layer w0.38: D41.2@53.844,47.042 53.619,46.817 53.619,46.583 52.75,45.714 52.75,35.786 53.019,35.517 R44.2@53.969,35.517 ; D41.2 54.325,47.025 54.325,51.075 G40.A2@54.55,51.3
NetD51_1: D51.1 G50.A1 Q52.3 R52.1 | length 21.8
  Top Layer w0.38: R52.1 69.5,41.417 69.5,42.206 69.723,42.429 Q52.3 79.595,46.577 79.373,46.8 D51.1 78.1,49.953 77.05,51.003 G50.A1@77.05,51.3
NetD51_2: D51.2 G50.A2 R54.2 | length 17.7
  Top Layer w0.38: D51.2@68.844,47.042 68.619,46.817 68.619,46.583 67.75,45.714 67.75,35.786 68.019,35.517 R54.2@68.969,35.517 ; D51.2 69.325,47.025 69.325,51.075 G50.A2@69.55,51.3
NetD61_1: D61.1 G60.A1 Q62.3 R62.1 | length 21.4
  Top Layer w0.38: R62.1 84.75,41.443 84.75,42.206 84.973,42.429 Q62.3 94.595,46.405 94.272,46.728 93.172,46.728 D61.1 93.1,50.25 G60.A1@92.05,51.3
NetD61_2: D61.2 G60.A2 R64.2 | length 17.7
  Top Layer w0.38: D61.2@84.094,47.042 83.869,46.817 83.869,46.583 83,45.714 83,35.786 83.269,35.517 R64.2@84.219,35.517 ; D61.2 84.325,47.025 84.325,51.075 G60.A2@84.55,51.3
NetD71_1: D71.1 G70.A1 Q72.3 R72.1 | length 21.5
  Top Layer w0.38: R72.1 99.75,41.418 99.75,42.206 99.973,42.429 Q72.3 109.595,46.405 109.222,46.778 108.072,46.778 D71.1 108.05,49.903 107.05,50.903 G70.A1@107.05,51.3
NetD71_2: D71.2 G70.A2 R74.2 | length 17.7
  Top Layer w0.38: D71.2@98.844,47.042 98.619,46.817 98.619,46.583 97.75,45.714 97.75,35.786 98.019,35.517 R74.2@98.969,35.517 ; D71.2 99.293,47.043 99.293,51.043 G70.A2@99.55,51.3
NetD81_1: D81.1 G80.A1 Q82.3 R82.1 | length 21.4
  Top Layer w0.38: R82.1 114.75,41.393 114.75,42.206 114.973,42.429 Q82.3 124.595,46.405 124.272,46.728 123.172,46.728 D81.1 123.1,49.953 122.05,51.003 G80.A1@122.05,51.3
NetD81_2: D81.2 G80.A2 R84.2 | length 17.7
  Top Layer w0.38: D81.2@114.094,47.042 113.869,46.817 113.869,46.583 113,45.714 113,35.786 113.269,35.517 R84.2@114.219,35.517 ; D81.2 114.325,47.025 114.325,51.075 G80.A2@114.55,51.3
NetD91_1: D91.1 G90.A1 Q92.3 R92.1 | length 19.6
  Top Layer w0.38: R92.1 129.75,41.368 129.75,42.206 129.973,42.429 Q92.3 138.795,44.537 138.735,44.597 138.735,46.165 D91.1 138.1,49.953 137.05,51.003 G90.A1@137.05,51.3
NetD91_2: D91.2 G90.A2 R94.2 | length 17.7
  Top Layer w0.38: D91.2@129.094,47.042 128.869,46.817 128.869,46.583 128,45.714 128,35.786 128.269,35.517 R94.2@129.219,35.517 ; D91.2 129.325,47.025 129.325,51.075 G90.A2@129.55,51.3
NetG10_11: G10.11 J15.2 | length 20.8
  Top Layer w1: J15.2 15.213,73.788 G10.11@17.7,71.3
  Bottom Layer w1: J15.2@15.263,88.975 15.263,91.075
NetG10_12: G10.12 J15.3 | length 25.2
  Top Layer w1: J15.3 11.713,88.939 12.75,87.902 12.75,71.25 G10.12@17.7,66.3
NetG10_14: G10.14 J15.1 | length 13.1
  Top Layer w1: G10.14@17.7,76.3 17.7,87.988 J15.1
NetG10_21: G10.21 J10.2 | length 34.3
  Top Layer w1: G10.21 9.711,71.539 8.961,71.539 8,72.5 8,92.625 J10.2
  Bottom Layer w1: J10.2 14.75,99.35 14.8,99.3 14.8,97.2
NetG10_22: G10.22 J10.3 | length 36.5
  Top Layer w1: G10.22 6.5,69.75 6.5,94.625 J10.3
NetG10_24: G10.24 J10.1 | length 26.5
  Top Layer w1: G10.24 9.946,76.304 9.946,91.071 J10.1
NetG20_11: G20.11 J25.2 | length 20.8
  Top Layer w1: J25.2 30.15,73.788 G20.11@32.638,71.3
  Bottom Layer w1: J25.2@30.2,88.975 30.2,91.075
NetG20_12: G20.12 J25.3 | length 25.2
  Top Layer w1: J25.3 26.65,88.939 27.688,87.902 27.688,71.25 G20.12@32.638,66.3
NetG20_14: G20.14 J25.1 | length 13.1
  Top Layer w1: G20.14@32.638,76.3 32.638,87.988 J25.1
NetG20_21: G20.21 J20.2 | length 33.7
  Top Layer w1: G20.21@24.887,71.3 23.071,73.116 23.071,92.759 J20.2
  Bottom Layer w1: 29.737,97.2 J20.2@29.737,99.3
NetG20_22: G20.22 J20.3 | length 36.8
  Top Layer w1: G20.22@24.887,66.3 21,70.187 21,94.188 J20.3
NetG20_24: G20.24 J20.1 | length 26.5
  Top Layer w1: G20.24 24.883,76.367 24.883,91.071 J20.1
NetG30_11: G30.11 J35.2 | length 20.8
  Top Layer w1: J35.2 45.087,73.788 G30.11@47.575,71.3
  Bottom Layer w1: J35.2@45.137,88.975 45.137,91.075
NetG30_12: G30.12 J35.3 | length 25.2
  Top Layer w1: J35.3 41.587,88.939 42.625,87.902 42.625,71.25 G30.12@47.575,66.3
NetG30_14: G30.14 J35.1 | length 13.1
  Top Layer w1: G30.14@47.575,76.3 47.575,87.988 J35.1
NetG30_21: G30.21 J30.2 | length 33.7
  Top Layer w1: G30.21@39.825,71.3 38.008,73.116 38.008,92.759 J30.2
  Bottom Layer w1: 44.675,97.2 J30.2@44.675,99.3
NetG30_22: G30.22 J30.3 | length 36.8
  Top Layer w1: G30.22@39.825,66.3 35.937,70.187 35.937,94.188 J30.3
NetG30_24: G30.24 J30.1 | length 26.5
  Top Layer w1: G30.24@39.887,76.3 39.821,76.367 39.821,91.071 J30.1
NetG40_11: G40.11 J45.2 | length 20.8
  Top Layer w1: J45.2 60.025,73.788 G40.11@62.513,71.3
  Bottom Layer w1: J45.2@60.075,88.975 60.075,91.075
NetG40_12: G40.12 J45.3 | length 25.2
  Top Layer w1: J45.3 56.525,88.939 57.563,87.902 57.563,71.25 G40.12@62.513,66.3
NetG40_14: G40.14 J45.1 | length 13.1
  Top Layer w1: G40.14@62.513,76.3 62.513,87.988 J45.1
NetG40_21: G40.21 J40.2 | length 33.7
  Top Layer w1: G40.21@54.762,71.3 52.946,73.116 52.946,92.759 J40.2
  Bottom Layer w1: 59.612,97.2 J40.2@59.612,99.3
NetG40_22: G40.22 J40.3 | length 36.8
  Top Layer w1: G40.22@54.762,66.3 50.875,70.187 50.875,94.188 J40.3
NetG40_24: G40.24 J40.1 | length 26.5
  Top Layer w1: G40.24@54.825,76.3 54.758,76.367 54.758,91.071 J40.1
NetG50_11: G50.11 J55.2 | length 20.8
  Top Layer w1: J55.2 74.962,73.788 G50.11
  Bottom Layer w1: J55.2@75.012,88.975 75.012,91.075
NetG50_12: G50.12 J55.3 | length 25.2
  Top Layer w1: J55.3 71.462,88.939 72.5,87.902 72.5,71.25 G50.12
NetG50_14: G50.14 J55.1 | length 13.1
  Top Layer w1: G50.14 77.45,87.988 J55.1
NetG50_21: G50.21 J50.2 | length 33.7
  Top Layer w1: G50.21@69.7,71.3 67.883,73.116 67.883,92.759 J50.2
  Bottom Layer w1: 74.55,97.2 J50.2@74.55,99.3
NetG50_22: G50.22 J50.3 | length 36.8
  Top Layer w1: G50.22@69.7,66.3 65.812,70.187 65.812,94.188 J50.3
NetG50_24: G50.24 J50.1 | length 26.5
  Top Layer w1: G50.24@69.762,76.3 69.696,76.367 69.696,91.071 J50.1
NetG60_11: G60.11 J65.2 | length 20.8
  Top Layer w1: J65.2 89.9,73.788 G60.11@92.387,71.3
  Bottom Layer w1: J65.2@89.95,88.975 89.95,91.075
NetG60_12: G60.12 J65.3 | length 25.2
  Top Layer w1: J65.3 86.4,88.939 87.437,87.902 87.437,71.25 G60.12@92.387,66.3
NetG60_14: G60.14 J65.1 | length 13.1
  Top Layer w1: G60.14@92.387,76.3 92.387,87.988 J65.1
NetG60_21: G60.21 J60.2 | length 33.7
  Top Layer w1: G60.21@84.637,71.3 82.821,73.116 82.821,92.759 J60.2
  Bottom Layer w1: 89.487,97.2 J60.2@89.487,99.3
NetG60_22: G60.22 J60.3 | length 36.8
  Top Layer w1: G60.22@84.637,66.3 80.75,70.187 80.75,94.188 J60.3
NetG60_24: G60.24 J60.1 | length 26.5
  Top Layer w1: G60.24@84.7,76.3 84.633,76.367 84.633,91.071 J60.1
NetG70_11: G70.11 J75.2 | length 20.8
  Top Layer w1: J75.2 104.837,73.788 G70.11@107.325,71.3
  Bottom Layer w1: J75.2@104.887,88.975 104.887,91.075
NetG70_12: G70.12 J75.3 | length 25.2
  Top Layer w1: J75.3 101.337,88.939 102.375,87.902 102.375,71.25 G70.12@107.325,66.3
NetG70_14: G70.14 J75.1 | length 13.1
  Top Layer w1: G70.14@107.325,76.3 107.325,87.988 J75.1
NetG70_21: G70.21 J70.2 | length 33.7
  Top Layer w1: G70.21@99.575,71.3 97.758,73.116 97.758,92.759 J70.2
  Bottom Layer w1: 104.425,97.2 J70.2@104.425,99.3
NetG70_22: G70.22 J70.3 | length 36.8
  Top Layer w1: G70.22@99.575,66.3 95.687,70.187 95.687,94.188 J70.3
NetG70_24: G70.24 J70.1 | length 26.5
  Top Layer w1: G70.24@99.637,76.3 99.571,76.367 99.571,91.071 J70.1
NetG80_11: G80.11 J85.2 | length 20.8
  Top Layer w1: J85.2 119.775,73.788 G80.11@122.262,71.3
  Bottom Layer w1: J85.2@119.825,88.975 119.825,91.075
NetG80_12: G80.12 J85.3 | length 25.2
  Top Layer w1: J85.3 116.275,88.939 117.312,87.902 117.312,71.25 G80.12@122.262,66.3
NetG80_14: G80.14 J85.1 | length 13.1
  Top Layer w1: G80.14@122.262,76.3 122.262,87.988 J85.1
NetG80_21: G80.21 J80.2 | length 33.7
  Top Layer w1: G80.21@114.512,71.3 112.696,73.116 112.696,92.759 J80.2
  Bottom Layer w1: 119.362,97.2 J80.2@119.362,99.3
NetG80_22: G80.22 J80.3 | length 36.8
  Top Layer w1: G80.22@114.512,66.3 110.625,70.187 110.625,94.188 J80.3
NetG80_24: G80.24 J80.1 | length 26.5
  Top Layer w1: G80.24@114.575,76.3 114.508,76.367 114.508,91.071 J80.1
NetG90_11: G90.11 J95.2 | length 20.8
  Top Layer w1: J95.2 134.712,73.788 G90.11@137.2,71.3
  Bottom Layer w1: J95.2@134.762,88.975 134.762,91.075
NetG90_12: G90.12 J95.3 | length 25.2
  Top Layer w1: J95.3 131.212,88.939 132.25,87.902 132.25,71.25 G90.12@137.2,66.3
NetG90_14: G90.14 J95.1 | length 13.1
  Top Layer w1: G90.14@137.2,76.3 137.2,87.988 J95.1
NetG90_21: G90.21 J90.2 | length 33.7
  Top Layer w1: G90.21@129.45,71.3 127.633,73.116 127.633,92.759 J90.2
  Bottom Layer w1: 134.3,97.2 J90.2@134.3,99.3
NetG90_22: G90.22 J90.3 | length 36.8
  Top Layer w1: G90.22@129.45,66.3 125.562,70.187 125.562,94.188 J90.3
NetG90_24: G90.24 J90.1 | length 26.5
  Top Layer w1: G90.24@129.512,76.3 129.446,76.367 129.446,91.071 J90.1
NetL11_1: L11.1 R12.2 | length 5
  Top Layer w0.38: R12.2 9.705,38.672 10.672,38.672 12.403,40.403 13.153,40.403 L11.1
NetL21_1: L21.1 R22.2 | length 5
  Top Layer w0.38: R22.2 24.755,38.697 25.697,38.697 27.453,40.453 28.253,40.453 L21.1
NetL31_1: L31.1 R32.2 | length 5
  Top Layer w0.38: R32.2 39.802,38.719 40.719,38.719 42.453,40.453 43.253,40.453 L31.1
NetL41_1: L41.1 R42.2 | length 5
  Top Layer w0.38: R42.2 54.839,38.732 55.732,38.732 57.453,40.453 58.253,40.453 L41.1
NetL51_1: L51.1 R52.2 | length 5
  Top Layer w0.38: R52.2 69.877,38.744 70.744,38.744 72.453,40.453 73.253,40.453 L51.1
NetL61_1: L61.1 R62.2 | length 4.9
  Top Layer w0.38: R62.2 84.907,38.75 86,38.75 87.502,40.252 88.052,40.252 L61.1
NetL71_1: L71.1 R72.2 | length 4.9
  Top Layer w0.38: R72.2 99.952,38.769 100.769,38.769 102.453,40.453 103.253,40.453 L71.1
NetL81_1: L81.1 R82.2 | length 4.9
  Top Layer w0.38: R82.2 114.989,38.782 115.782,38.782 117.453,40.453 118.253,40.453 L81.1
NetL91_1: L91.1 R92.2 | length 4.9
  Top Layer w0.38: R92.2 130.027,38.794 130.794,38.794 132.453,40.453 133.253,40.453 L91.1
NetQ10_2: Q10.2 R15.1 | length 7.7
  Top Layer w0.381: R15.1 10.4,22.4 12,24 14,24 14.685,24.685 14.685,25.606 Q10.2
NetQ10_3: Q10.3 R13.2 | length 2.5
  Top Layer w0.38: Q10.3 17.064,33.411 R13.2
NetQ11_2: Q11.2 R11.1 | length 3.4
  Top Layer w0.381: Q11.2 15.466,21.114 R11.1
NetQ11_3: Q11.3 R15.2 | length 5.6
  Top Layer w0.381: R15.2 10.675,18.264 13.754,21.343 13.754,22.001 Q11.3
NetQ12_2: Q12.2 R13.1 | length 8.6
  Top Layer w0.38: Q12.2 19.371,39.605 18.578,39.605 18,39.027 18,36.5 20.125,34.375 R13.1
NetQ20_2: Q20.2 R25.1 | length 7.7
  Top Layer w0.381: R25.1 25.413,22.413 27,24 29,24 29.729,24.729 29.729,25.65 Q20.2
NetQ20_3: Q20.3 R23.2 | length 2.5
  Top Layer w0.38: Q20.3 32.064,33.411 R23.2
NetQ21_2: Q21.2 R21.1 | length 3.6
  Top Layer w0.381: Q21.2 28.978,19.978 29,20 29.29,20 30.404,21.114 R21.1
NetQ21_3: Q21.3 R25.2 | length 5.6
  Top Layer w0.381: R25.2 25.688,18.264 28.754,21.33 28.754,22.001 Q21.3
NetQ22_2: Q22.2 R23.1 | length 8.6
  Top Layer w0.38: Q22.2@34.595,40.015 34.371,39.791 33.578,39.791 33,39.214 33,36.5 35.125,34.375 R23.1@35.125,33.386
NetQ30_2: Q30.2 R35.1 | length 7.7
  Top Layer w0.381: R35.1 40.425,22.425 42,24 44,24 44.83,24.83 44.83,25.751 Q30.2
NetQ30_3: Q30.3 R33.2 | length 2.5
  Top Layer w0.38: Q30.3 47.064,33.411 R33.2
NetQ31_2: Q31.2 R31.1 | length 3.4
  Top Layer w0.381: Q31.2 45.466,21.114 R31.1
NetQ31_3: Q31.3 R35.2 | length 5.6
  Top Layer w0.381: R35.2 40.7,18.264 43.754,21.318 43.754,22.001 Q31.3
NetQ32_2: Q32.2 R33.1 | length 8.6
  Top Layer w0.38: Q32.2@49.345,40.015 49.121,39.791 48.328,39.791 47.75,39.214 47.75,36.5 49.875,34.375 R33.1@49.875,33.386
NetQ40_2: Q40.2 R45.1 | length 7.7
  Top Layer w0.381: R45.1 55.438,22.438 57,24 59,24 59.83,24.83 59.83,25.751 Q40.2
NetQ40_3: Q40.3 R43.2 | length 2.5
  Top Layer w0.38: Q40.3 62.064,33.411 R43.2
NetQ41_2: Q41.2 R41.1 | length 3.3
  Top Layer w0.381: Q41.2 60.304,20.951 61.537,20.951 R41.1
NetQ41_3: Q41.3 R45.2 | length 5.6
  Top Layer w0.381: R45.2 55.797,18.623 56.123,18.623 58.78,21.28 58.78,22.028 Q41.3
NetQ42_2: Q42.2 R43.1 | length 8.6
  Top Layer w0.38: Q42.2@64.345,40.015 64.121,39.791 63.328,39.791 62.75,39.214 62.75,36.5 64.875,34.375 R43.1@64.875,33.386
NetQ50_2: Q50.2 R55.1 | length 7.7
  Top Layer w0.381: R55.1 70.45,22.45 72,24 74,24 74.83,24.83 74.83,25.751 Q50.2
NetQ50_3: Q50.3 R53.2 | length 2.5
  Top Layer w0.38: Q50.3 77.064,33.411 R53.2
NetQ51_2: Q51.2 R51.1 | length 3.3
  Top Layer w0.381: Q51.2 75.466,21.114 R51.1
NetQ51_3: Q51.3 R55.2 | length 5.7
  Top Layer w0.381: R55.2 70.45,18.45 70.5,18.5 70.961,18.5 73.754,21.293 73.754,22.001 Q51.3
NetQ52_2: Q52.2 R53.1 | length 8.6
  Top Layer w0.38: Q52.2@79.345,40.015 79.121,39.791 78.328,39.791 77.75,39.214 77.75,36.5 79.875,34.375 R53.1@79.875,33.386
NetQ60_2: Q60.2 R65.1 | length 7.7
  Top Layer w0.381: R65.1 85.463,22.463 87,24 89,24 89.83,24.83 89.83,25.751 Q60.2
NetQ60_3: Q60.3 R63.2 | length 2.5
  Top Layer w0.38: Q60.3 92.064,33.411 R63.2
NetQ61_2: Q61.2 R61.1 | length 3.3
  Top Layer w0.381: Q61.2 90.466,21.114 R61.1
NetQ61_3: Q61.3 R65.2 | length 5.6
  Top Layer w0.381: R65.2 85.737,18.264 88.754,21.28 88.754,22.001 Q61.3
NetQ62_2: Q62.2 R63.1 | length 8.6
  Top Layer w0.38: Q62.2@94.345,40.015 94.121,39.791 93.328,39.791 92.75,39.214 92.75,36.5 94.765,34.485 94.765,33.496 R63.1@94.875,33.386
NetQ70_2: Q70.2 R75.1 | length 7.7
  Top Layer w0.381: R75.1 100.475,22.475 102,24 104,24 104.83,24.83 104.83,25.751 Q70.2
NetQ70_3: Q70.3 R73.2 | length 2.5
  Top Layer w0.38: Q70.3 107.064,33.411 R73.2
NetQ71_2: Q71.2 R71.1 | length 3.4
  Top Layer w0.381: Q71.2 105.466,21.114 R71.1
NetQ71_3: Q71.3 R75.2 | length 5.6
  Top Layer w0.381: R75.2 100.75,18.264 103.754,21.268 103.754,22.001 Q71.3
NetQ72_2: Q72.2 R73.1 | length 8.6
  Top Layer w0.38: Q72.2@109.345,40.015 109.121,39.791 108.328,39.791 107.75,39.214 107.75,36.5 109.875,34.375 R73.1@109.875,33.386
NetQ80_2: Q80.2 R85.1 | length 7.9
  Top Layer w0.381: R85.1 115.488,21.013 115.5,21 115.5,22.5 117,24 119,24 119.83,24.83 119.83,25.751 Q80.2
NetQ80_3: Q80.3 R83.2 | length 2.5
  Top Layer w0.38: Q80.3 122.064,33.411 R83.2
NetQ81_2: Q81.2 R81.1 | length 3.5
  Top Layer w0.381: Q81.2 120.466,21.114 R81.1
NetQ81_3: Q81.3 R85.2 | length 5.6
  Top Layer w0.381: R85.2 115.762,18.264 118.754,21.255 118.754,22.001 Q81.3
NetQ82_2: Q82.2 R83.1 | length 8.6
  Top Layer w0.38: Q82.2@124.345,40.015 124.121,39.791 123.328,39.791 122.75,39.214 122.75,36.25 124.765,34.235 124.765,33.496 R83.1@124.875,33.386
NetQ90_2: Q90.2 R95.1 | length 7.7
  Top Layer w0.381: R95.1 130.5,22.5 132,24 134,24 134.83,24.83 134.83,25.751 Q90.2
NetQ90_3: Q90.3 R93.2 | length 4.9
  Top Layer w0.38: Q90.3 134.87,31.63 135.925,30.575 R93.2
NetQ91_2: Q91.2 R91.1 | length 3.6
  Top Layer w0.381: Q91.2 135.466,21.114 R91.1
NetQ91_3: Q91.3 R95.2 | length 5.6
  Top Layer w0.381: R95.2 130.775,18.264 133.754,21.243 133.754,22.001 Q91.3
NetQ92_2: Q92.2 R93.1 | length 6.9
  Top Layer w0.38: R93.1 137.6,36.027 137.576,36.051 137.576,38.61 Q92.2
VCC: J700.1 J700.2 J800.1 J800.2 | length 150.9
  Bottom Layer w1: 144,94 144.306,94.306
  Bottom Layer w2: J800.2 3.5,94 ; J800.1 3.5,94 ; 144,94 3.5,94 ; J700.1 J700.2
copper on no net:
  other v2: 3,3 145,3 3,105 145,105

## Polygon pours and split planes (outlines as drawn)
GND_MCU on Top Layer "NONET_L-01_P-001" (solid, pour order 9): 0.1,21.7 0.2,21.8 3,21.8 3.4,22.2 3.4,28 147.9,28 148,28.1 148.2,27.9 148.2,-0.1 0.1,-0.1
GND_MCU on Top Layer "NONET_L-01_P-001" (solid, pour order 6): 0,21.8 0.1,21.9 2.9,21.9 3.3,22.3 3.3,28.1 147.8,28.1 147.9,28.2 148.1,28 148.1,0 0,0
GND on Top Layer "NONET_L-01_P-001" (solid, remove dead copper, pour order 13): 0,22.9 2.9,22.9 3,23 3,28.6 148,28.6 148,57.5 147.9,57.4 0,57.4
+15v on Top Layer "x" (solid, pour order 1): 121.525,5.875 121.025,5.375 117.025,5.375 116.525,5.875 116.525,9.875 116.275,10.125 108.775,10.125 104.025,5.375 104.025,3.375 100.025,3.375 100.025,5.891 102.525,5.875 102.525,11.375 120.025,11.375 121.525,9.875
+15v on Top Layer "NONET_L-01_P-001" (solid, pour order 0): 26.5,6 27,5.5 31,5.5 31.5,6 31.5,7.5 32,7.5 32.5,8 37.5,8 40,10.5 43.5,10.5 44,10 44,3.5 48,3.5 48,6.016 45.5,6 45.5,11.5 28,11.5 26.5,10
no net on Bottom Solder "NONET_L-01_P-001" (solid): 133.562,87.675 133.562,89.575 134.262,90.275 134.262,91.075 cw(c134.762,91.075) 135.262,91.075 135.262,90.275 135.862,89.675 135.862,87.675
no net on Bottom Solder "NONET_L-01_P-001" (solid): 118.625,87.675 118.625,89.575 119.325,90.275 119.325,91.075 cw(c119.825,91.075) 120.325,91.075 120.325,90.275 120.925,89.675 120.925,87.675
no net on Bottom Solder "NONET_L-01_P-001" (solid): 103.687,87.675 103.687,89.575 104.387,90.275 104.387,91.075 cw(c104.887,91.075) 105.387,91.075 105.387,90.275 105.987,89.675 105.987,87.675
no net on Bottom Solder "NONET_L-01_P-001" (solid): 88.75,87.675 88.75,89.575 89.45,90.275 89.45,91.075 cw(c89.95,91.075) 90.45,91.075 90.45,90.275 91.05,89.675 91.05,87.675
no net on Bottom Solder "NONET_L-01_P-001" (solid): 73.812,87.675 73.812,89.575 74.512,90.275 74.512,91.075 cw(c75.012,91.075) 75.512,91.075 75.512,90.275 76.112,89.675 76.112,87.675
no net on Bottom Solder "NONET_L-01_P-001" (solid): 58.875,87.675 58.875,89.575 59.575,90.275 59.575,91.075 cw(c60.075,91.075) 60.575,91.075 60.575,90.275 61.175,89.675 61.175,87.675
no net on Bottom Solder "NONET_L-01_P-001" (solid): 43.937,87.675 43.937,89.575 44.637,90.275 44.637,91.075 cw(c45.137,91.075) 45.637,91.075 45.637,90.275 46.237,89.675 46.237,87.675
no net on Bottom Solder "NONET_L-01_P-001" (solid): 29,87.675 29,89.575 29.7,90.275 29.7,91.075 cw(c30.2,91.075) 30.7,91.075 30.7,90.275 31.3,89.675 31.3,87.675
no net on Bottom Solder "NONET_L-01_P-001" (solid): 14.063,87.675 14.063,89.575 14.763,90.275 14.763,91.075 cw(c15.262,91.075) 15.763,91.075 15.763,90.275 16.363,89.675 16.363,87.675
no net on Bottom Solder "NONET_L-01_P-001" (solid): 133.1,100.6 133.1,98.7 133.8,98 133.8,97.2 ccw(c134.3,97.2) 134.8,97.2 134.8,98 135.4,98.6 135.4,100.6
no net on Bottom Solder "NONET_L-01_P-001" (solid): 118.162,100.6 118.162,98.7 118.862,98 118.862,97.2 ccw(c119.362,97.2) 119.862,97.2 119.862,98 120.462,98.6 120.462,100.6
no net on Bottom Solder "NONET_L-01_P-001" (solid): 103.225,100.6 103.225,98.7 103.925,98 103.925,97.2 ccw(c104.425,97.2) 104.925,97.2 104.925,98 105.525,98.6 105.525,100.6
no net on Bottom Solder "NONET_L-01_P-001" (solid): 88.287,100.6 88.287,98.7 88.987,98 88.987,97.2 ccw(c89.487,97.2) 89.987,97.2 89.987,98 90.587,98.6 90.587,100.6
no net on Bottom Solder "NONET_L-01_P-001" (solid): 73.35,100.6 73.35,98.7 74.05,98 74.05,97.2 ccw(c74.55,97.2) 75.05,97.2 75.05,98 75.65,98.6 75.65,100.6
no net on Bottom Solder "NONET_L-01_P-001" (solid): 58.412,100.6 58.412,98.7 59.112,98 59.112,97.2 ccw(c59.612,97.2) 60.112,97.2 60.112,98 60.712,98.6 60.712,100.6
no net on Bottom Solder "NONET_L-01_P-001" (solid): 43.475,100.6 43.475,98.7 44.175,98 44.175,97.2 ccw(c44.675,97.2) 45.175,97.2 45.175,98 45.775,98.6 45.775,100.6
no net on Bottom Solder "NONET_L-01_P-001" (solid): 28.537,100.6 28.537,98.7 29.237,98 29.237,97.2 ccw(c29.737,97.2) 30.237,97.2 30.237,98 30.837,98.6 30.837,100.6
no net on Bottom Solder "NONET_L-01_P-001" (solid): 13.6,100.6 13.6,98.7 14.3,98 14.3,97.2 ccw(c14.8,97.2) 15.3,97.2 15.3,98 15.9,98.6 15.9,100.6
GND_MCU on Bottom Layer "NONET_L-01_P-001" (solid, pour order 12): 0.091,21.8 0.191,21.9 2.991,21.9 3.391,22.3 3.391,28.1 147.891,28.1 147.991,28.2 148.191,28 148.191,0 0.091,0
GND on Bottom Layer "NONET_L-01_P-001" (solid, remove dead copper, pour order 10): 0,22.9 2.9,22.9 3,23 3,28.6 148,28.6 148,57.5 147.9,57.4 0,57.4

## Other copper
Multi-Layer:
  pour cut-out: 148,7 147.996,7 143.592,7 ccw(c143.592,4.408) 141,4.408 141,0.004 142.496,0 148,0
  pour cut-out: 0,7 0.004,7 4.408,7 cw(c4.408,4.408) 7,4.408 7,0.004 5.504,0 0,0

## Silkscreen, mask and mechanical layers (free items; w line width, h text height)
Top Overlay:
  lines w0.254: 1.506,47.8 1.827,47.487 ; 1.827,49.287 1.827,47.487 ; 3.3,22.333 3.983,21.65 ; 4,20.15 4,21.65 ; 4,22.65 4,23.65 ; 51.583,8.059 51.583,1.713 53.059,1.713 ; 52.6,4.425 52.6,3.676 53.059,3.676 ; 95.043,1.483 96.519,1.483 96.519,7.829 ; 95.043,3.446 95.502,3.446 95.502,4.196 ; 143.3,22.333 143.983,21.65 ; 144,20.15 144,21.65 ; 144,22.65 144,23.65 ; 144.831,47.591 145.152,47.278 ; 145.152,49.078 145.152,47.278 ; 145.473,47.591 145.152,47.278 ; 1.827,47.487 2.148,47.8 1.827,47.487
  text "GND" at 1.091,49.996 h1.52
  text "VCC" at 142.091,49.786 h1.52
  text "GND" at 1.091,15.696 h1.52
  text "VCC" at 143.091,15.696 h1.52
  text "PWR" at 53.904,2.764 h1.52
  text "GND" at 90.254,2.764 h1.52
  text "CH1" at 53.854,0.554 h1.52
  text "CH9" at 90.254,0.554 h1.52
Bottom Overlay:
  drawing of 36 lines, arcs and shapes, not listed
  text "NC" at 12.046,101.854 h1
  text "COM" at 16.146,101.854 h1
  text "NO" at 19.246,101.854 h1
  text "NC" at 26.984,101.854 h1
  text "COM" at 31.084,101.854 h1
  text "NO" at 34.184,101.854 h1
  text "NC" at 56.859,101.854 h1
  text "COM" at 60.959,101.854 h1
  text "NO" at 64.059,101.854 h1
  text "NC" at 71.796,101.854 h1
  text "COM" at 75.896,101.854 h1
  text "NO" at 78.996,101.854 h1
  text "NC" at 86.734,101.854 h1
  text "COM" at 90.834,101.854 h1
  text "NO" at 93.934,101.854 h1
  text "NC" at 101.671,101.854 h1
  text "COM" at 105.771,101.854 h1
  text "NO" at 108.871,101.854 h1
  text "NC" at 116.609,101.854 h1
  text "COM" at 120.709,101.854 h1
  text "NO" at 123.809,101.854 h1
  text "NC" at 131.546,101.854 h1
  text "COM" at 135.646,101.854 h1
  text "NO" at 138.746,101.854 h1
  text "NC" at 41.796,101.729 h1
  text "COM" at 45.896,101.729 h1
  text "NO" at 48.996,101.729 h1
  text "Relay_Board_V2.0" at 84.197,83.7 h1.2
  text "Serial Number :" at 83.297,80.256 h1.2
Top Solder:
  rectangle: 1.5,18.75 2.5,21
  rectangle: 1.5,23.35 2.5,25.6